# Altium PCB PCB.pcbdoc
Units mm, origin at the board's own origin, x right, y up, seen from the top; angles counter-clockwise.
Board outline 63 x 60.2 mm, 2 copper layers (Top Layer, Bottom Layer); 26 components, 12 nets, 56 pads, 50 vias.
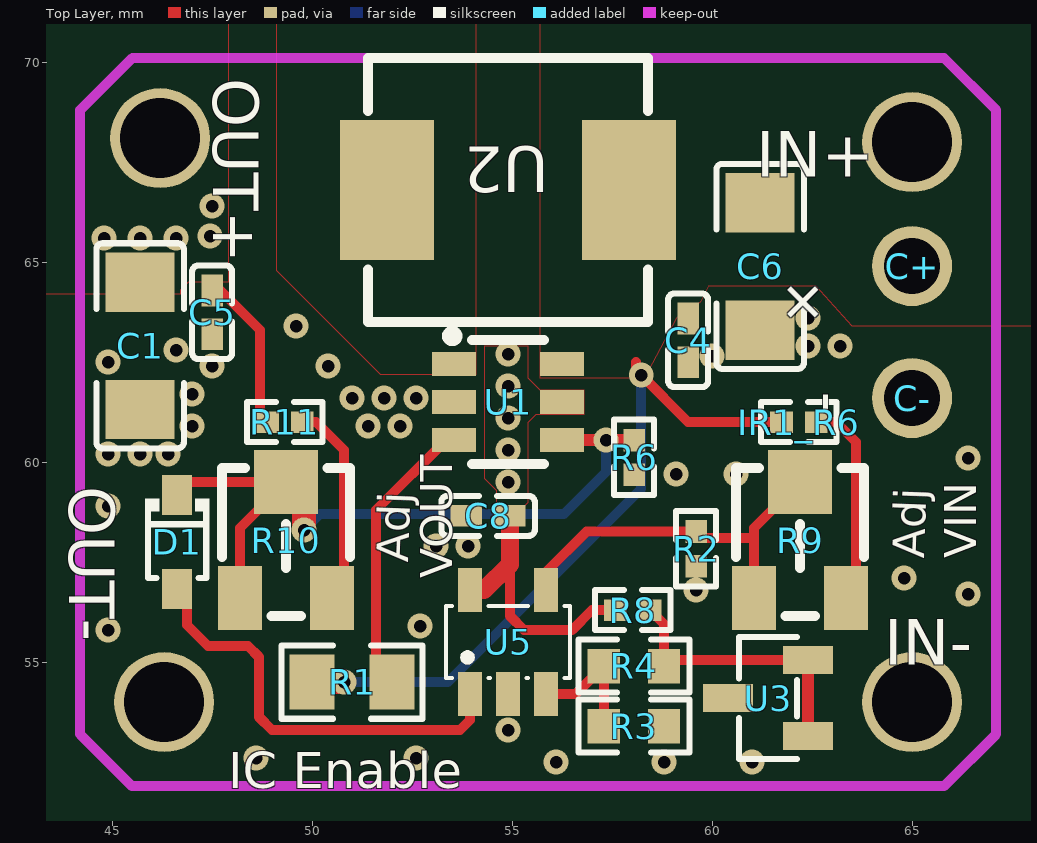
[diagram p0: Top Layer view]
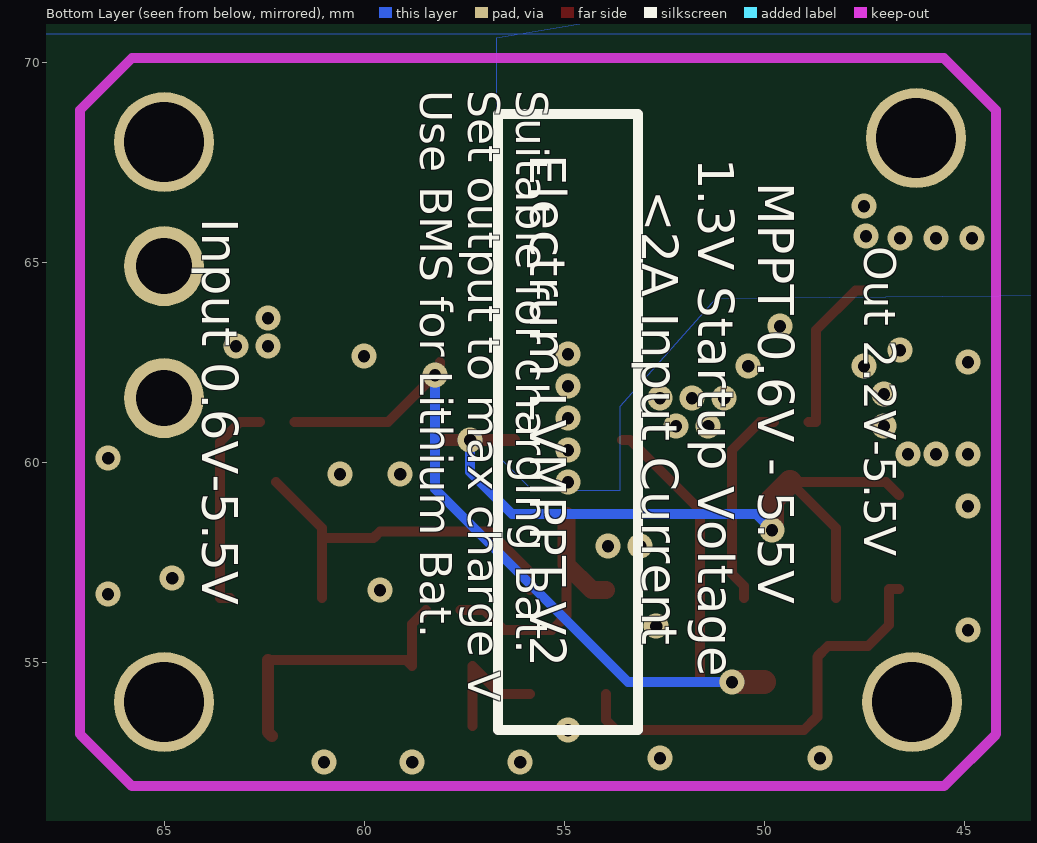
[diagram p1: Bottom Layer view, seen from below]

## Layer stack, top to bottom
Top Layer: signal copper (thickness not stored)
Dielectric: dielectric 0.32, FR-4, Dk 4.8
Bottom Layer: signal copper (thickness not stored)

## Board outline
88.4,25.4 25.4,25.4 25.4,85.6 88.4,85.6

## Components (designator, comment, footprint, x,y, rotation, side; value= is the part's Value field where it differs from the comment)
C1 "47uF" C1206 45.7,62.907 r90 top
C4 "100nF" C0402 59.4,63.045 r90 top
C5 "100nF" C0402 47.5,63.745 r90 top
C6 "47uF" C1206 61.2,64.892 r90 top
C8 "100nF" C0402 54.4,58.655 r180 top
C+ "ThroughHole" THRO_HOLE_FP#1 65,64.9 r0 top
C- "ThroughHole" THRO_HOLE_FP#1 65,61.6 r0 top
D1 "1N4148WS T4" SOD-323_L1.8-W1.3-LS2.5-RD 46.627,58 r270 top
IN+ "ThroughHole" THRO_HOLE_FP#2 65,68 r0 top
IN- "ThroughHole" THRO_HOLE_FP#2 65,54 r0 top
IR1_R6 "10kΩ" R0402 62.167,61 r0 top
OUT+ "ThroughHole" THRO_HOLE_FP#2 46.2,68.1 r0 top
OUT- "ThroughHole" THRO_HOLE_FP#2 46.3,54 r0 top
R1 "0Ω" R0805 51,54.5 r180 top
R2 "47kΩ" R0402 59.6,57.833 r90 top
R3 "330kΩ" R0603 58.047,53.4 r0 top
R4 "470kΩ" R0603 58.047,54.9 r180 top
R6 "47kΩ" R0402 58.05,60.117 r90 top
R8 "47kΩ" R0402 58.017,56.3 r180 top
R9 "500kΩ" RES-ADJ-SMD_3313J-1 62.2,58.05 r0 top
R10 "500kΩ" RES-ADJ-SMD_3313J-1 49.35,58.05 r0 top
R11 "100kΩ" R0402 49.317,61 r180 top
U1 "TLV61070" SOT-23-6_L2.9-W1.6-P0.95-LS2.8-BR 54.9,61.5 r180 top
U2 "4.7uH" IND-SMD_L7.0-W6.6_APH0630 54.9,66.8 r180 top
U3 "TL432 0.5%" SOT-23-3_L2.9-W1.3-P1.90-LS2.4-BR 61.4,54.1 r0 top
U5 "MCP6001T-I/OT" SOT-23-5_L3.0-W1.7-P0.95-LS2.8-BR 54.9,55.5 r270 top

## Footprints (in the part's own frame and the unit in brackets; to place one, negate y for a bottom-side part, rotate by r counter-clockwise, add the part's x,y. Pads: shape width x height; smd on the part's side, far side on the other; paste and mask are expansions set on the pad)
C0402 [mm]
  rect 0.79x0.54 smd paste-100 mask+0.051: 1(-0.545,0) 2(0.545,0)
  silkscreen extent -1.17,-0.5 1.17,0.5
C1206 [mm]
  rect 1.485x1.728 smd paste-100 mask+0.051: 1(-1.593,0) 2(1.593,0)
  silkscreen extent -2.56,-1.09 2.56,1.09
IND-SMD_L7.0-W6.6_APH0630 [mm]
  rect 2.35x3.5 smd paste+0 mask+0.051: 1(-3.025,0) 2(3.025,0)
  silkscreen extent -3.5,-3.3 3.5,3.3
R0402 [mm]
  rect 0.566x0.54 smd paste-100 mask+0.051: 1(-0.433,0) 2(0.433,0)
  silkscreen extent -0.94,-0.5 0.94,0.5
R0603 [mm]
  rect 0.806x0.864 smd paste-100 mask+0.051: 1(-0.753,0) 2(0.753,0)
  silkscreen extent -1.39,-0.66 1.39,0.66
R0805 [mm]
  rect 1.133x1.377 smd paste-100 mask+0.051: 1(-1,0) 2(1,0)
  silkscreen extent -1.76,-0.92 1.76,0.92
RES-ADJ-SMD_3313J-1 [mm]
  rect 1.1x1.6 smd paste+0 mask+0.051: 1(1.15,-1.45) 3(-1.15,-1.45)
  rect 1.6x1.6 smd paste+0 mask+0.051: 2(0,1.45)
  silkscreen extent -1.6,-1.9 1.6,1.8
SOD-323_L1.8-W1.3-LS2.5-RD [mm]
  rect 1x0.75 smd paste+0 mask+0.051: 1(-1.173,0) 2(1.173,0)
  silkscreen extent -1.08,-0.8 0.9,0.8
SOT-23-3_L2.9-W1.3-P1.90-LS2.4-BR [mm]
  rect 1.25x0.7 smd paste+0 mask+0.051: 1(1,-0.95) 2(1,0.95) 3(-1,0)
  silkscreen extent -0.73,-1.53 0.73,1.53
SOT-23-5_L3.0-W1.7-P0.95-LS2.8-BR [mm]
  rect 1.1x0.6 smd paste+0 mask+0.051: 1(1.3,-0.95) 2(1.3,0) 3(1.3,0.95) 4(-1.3,0.95) 5(-1.3,-0.95)
  silkscreen extent -0.9,-1.55 0.9,1.55
SOT-23-6_L2.9-W1.6-P0.95-LS2.8-BR [mm]
  rect 1.1x0.6 smd paste+0 mask+0.051: 1(1.35,-0.95) 2(1.35,0) 3(1.35,0.95) 4(-1.35,0.95) 5(-1.35,0) 6(-1.35,-0.95)
  silkscreen extent -0.9,-1.78 1.52,1.55
THRO_HOLE_FP#1 [mm]
  round 2 hole 1.4 paste+0 mask+0.051: 1(0,0)
THRO_HOLE_FP#2 [mm]
  round 2.5 hole 2 paste+0 mask+0.051: 1(0,0)

## Via types
v1: diameter 0.62, hole 0.31, Top Layer to Bottom Layer, tented both sides, 50 vias

## Nets (pads, with @x,y where several pads share a name; then routed paths per layer and width w, separated by ;. In a path a pad name is that pad's centre, name@x,y a point inside that pad or via, vN(x,y) a via of type N, cw(c..) or ccw(c..) an arc to the next point about the centre after c; other vN are vias at no path point)
D1_1: D1.1 R6.2 R10.2 R10.3 U1.4 | length 18.4
  Top Layer w0.25: D1.1 46.955,59.5 R10.2 48.2,58.35 R10.3@48.2,56.6
  Top Layer w0.3: U1.4 v1(57.35,60.55) R6.2
  Top Layer w0.6: R10.2 49.8,59.05 v1(49.8,58.3)
  Bottom Layer w0.25: v1(49.8,58.3) 50.199,58.701 56.3,58.701 57.349,59.75 v1@57.349,60.55
D1_2: D1.2 U5.1 | length 10.9
  Top Layer w0.25: D1.2 46.874,56.827 46.874,55.925 47.4,55.399 48.401,55.399 48.668,55.132 48.668,53.631 48.998,53.301 53.699,53.301 53.951,53.55 U5.1
GND: C1.1 C4.1 C5.1 C6.1 C8.2 C-.1 IN-.1 OUT-.1 R2.1 R3.2 R6.1 U1.2 U3.3 U5.2
  other v1: 56.1,52.5 58.8,52.5 61,52.5 48.6,52.6 52.6,52.6 54.9,53.3 44.9,55.8 52.7,55.9 66.4,56.7 59.6,56.8 64.8,57.1 53.1,57.9 53.9,57.9 44.9,58.9 59.1,59.7 60.6,59.7 66.4,60.1 44.9,60.2 45.7,60.2 46.4,60.2 47,60.9 51.4,60.9 52.2,60.9 51,61.6 51.8,61.6 52.6,61.6 47,61.7 47.5,62.4 50.4,62.4 44.9,62.5 60,62.65 46.6,62.8 62.4,62.9 63.2,62.9 49.6,63.4 62.4,63.6
IR1_R6_2: IR1_R6.2 R9.1 | length 5.4
  Top Layer w0.25: IR1_R6.2@62.6,61 63.1,61 63.6,60.499 63.6,56.6 R9.1@63.349,56.6
OPAMP+: R3.1 R4.2 U5.3 | length 3.2
  Top Layer w0.25: U5.3 56.593,54.2 R4.2 R3.1
OUT+: C1.2 C5.2 C8.1 OUT+.1 R8.2 R11.2 U1.5 U5.5 | length 10.8
  Top Layer w0.25: C5.2@47.499,64.289 47.71,64.289 48.701,63.301 48.701,61 R11.2@48.884,61 ; 54.944,57.444 54.944,56.156 55.3,55.8 56.501,55.8 56.999,56.301 R8.2@57.583,56.301
  Top Layer w0.45: U5.5@53.951,56.801 54.301,56.801 54.944,57.444 C8.1@54.944,58.655
  other v1: 54.9,59.5 54.9,60.3 54.9,61.1 54.9,61.9 54.9,62.7 44.8,65.6 45.7,65.6 46.6,65.6 47.45,65.65 47.5,66.4
R2_2: R2.2 R9.2 R9.3 U5.4 | length 9.5
  Top Layer w0.25: U5.4 55.85,57.25 56.865,58.265 R2.2 59.759,58.107 61.05,58.107 ; R9.3 61.05,58.35 R9.2
R4_1: R4.1 R8.1 U3.1 U3.2 | length 7.1
  Top Layer w0.25: R8.1 58.8,55.95 R4.1 58.95,55.05 U3.2
  Top Layer w0.3: U3.1@62.3,53.15 62.4,53.25 U3.2
R10_1: R10.1 R11.1 | length 5.2
  Top Layer w0.25: R11.1 50.1,61 50.8,60.3 50.8,57.2 50.5,56.9 R10.1
U1_1: U1.1 U2.2
U1_3: R1.1 U1.3 | length 7.4
  Top Layer w0.25: R1.1 51.599,54.5 51.599,58.8 53.351,60.55 U1.3
U1_6: C4.2 C6.2 C+.1 IN+.1 IR1_R6.1 R1.2 U1.6 U2.1 | length 17.4
  Top Layer w0.25: 58.101,62.501 58.101,62.3 v1(58.227,62.174) 59.399,61 IR1_R6.1@61.733,61
  Top Layer w0.6: R1.2 v1(50.8,54.5)
  Bottom Layer w0.25: v1@50.799,54.5 53.4,54.5 58.226,59.326 v1@58.226,62.173

## Polygon pours and split planes (outlines as drawn)
U1_6 on Top Layer (solid): 55.7,62.1 55.7,63.1 55.7,71.6 68.8,71.6 68.8,65.9 68.5,63.4 63.5,63.4 62.6,64.4 59.9,64.4 59.7,64 59.1,63.6 58.3,62.1 56.8,62.1
OUT+ on Top Layer (solid): 55.7,61.8 55.4,62.1 55.4,62.3 55.4,62.9 54.3,62.9 54.3,59.6 54.6,59.3 54.6,58.9 55.3,58.9 55.4,59 55.4,61 55.6,61.2 56.8,61.2 56.8,61.8
U1_1 on Top Layer (solid): 54.1,62.7 54.1,71 53.5,71.6 48.8,71.6 49.1,71.1 49.1,64.8 51.7,62.2 54.1,62.2
OUT+ on Top Layer (solid): 43.3,71.4 47.9,71.4 47.9,64.5 46.9,64.5 46.7,64.3 46.7,64.2 43.3,64.2
GND on Top Layer (solid): 38.1,72.9 39,72 75.5,72 75.5,47.5 74.3,46.3 38.2,46.3
OUT+ on Bottom Layer (solid): 39.2,72.1 49,71.9 56.7,70.6 56.7,60.2 55.8,59.3 53.6,59.3 53.6,61.4 51.2,64.1 39.9,64.2
GND on Bottom Layer (solid): 38.3,71.6 39.2,70.7 75.7,70.7 75.7,46.2 74.5,45 38.4,45

## Silkscreen, mask and mechanical layers (free items; w line width, h text height)
Top Overlay:
  text "+" at 62.396,64.804 h1.14 r225
  text "-" at 63.271,61.2 h1.14 r90
  text "VIN" at 66.6,57.6 h0.8 r90
  text "Adj" at 65.3,57.586 h0.8 r88
  text "Adj" at 52.4,57.486 h0.8 r88
  text "VOUT" at 53.5,57.1 h0.8 r90
  text "IC Enable" at 47.9,51.85 h0.9
Bottom Overlay:
  lines w0.254: 53.15,53.3 56.65,53.3 56.65,68.7 53.15,68.7 53.15,53.3
  text "Suitable for charging Bat. / Set output to max charge V / Use BMS for Lithium Bat." at 58.6,69.3 h0.8 r90
  text "Electrum LVMPPT V2" at 55.85,67.7 h0.9 r90
  text "1.3V Startup Voltage" at 51.65,67.6 h0.9 r90
  text "MPPT 0.6V - 5.5V" at 50.15,67 h0.9 r90
  text "<2A Input Current" at 53.05,66.8 h0.9 r90
  text "Input 0.6V-5.5V" at 64.05,66.1 h0.9 r90
  text "Out 2.2V-5.5V" at 47.5,65.4 h0.8 r90